# Altium PCB pilar_3.PcbDoc
Units mm, origin at the board's own origin, x right, y up, seen from the top; angles counter-clockwise.
Board outline 30 x 50.01 mm, 2 copper layers (Top Layer, Bottom Layer); 6 components, 4 nets, 16 pads, 2 vias.
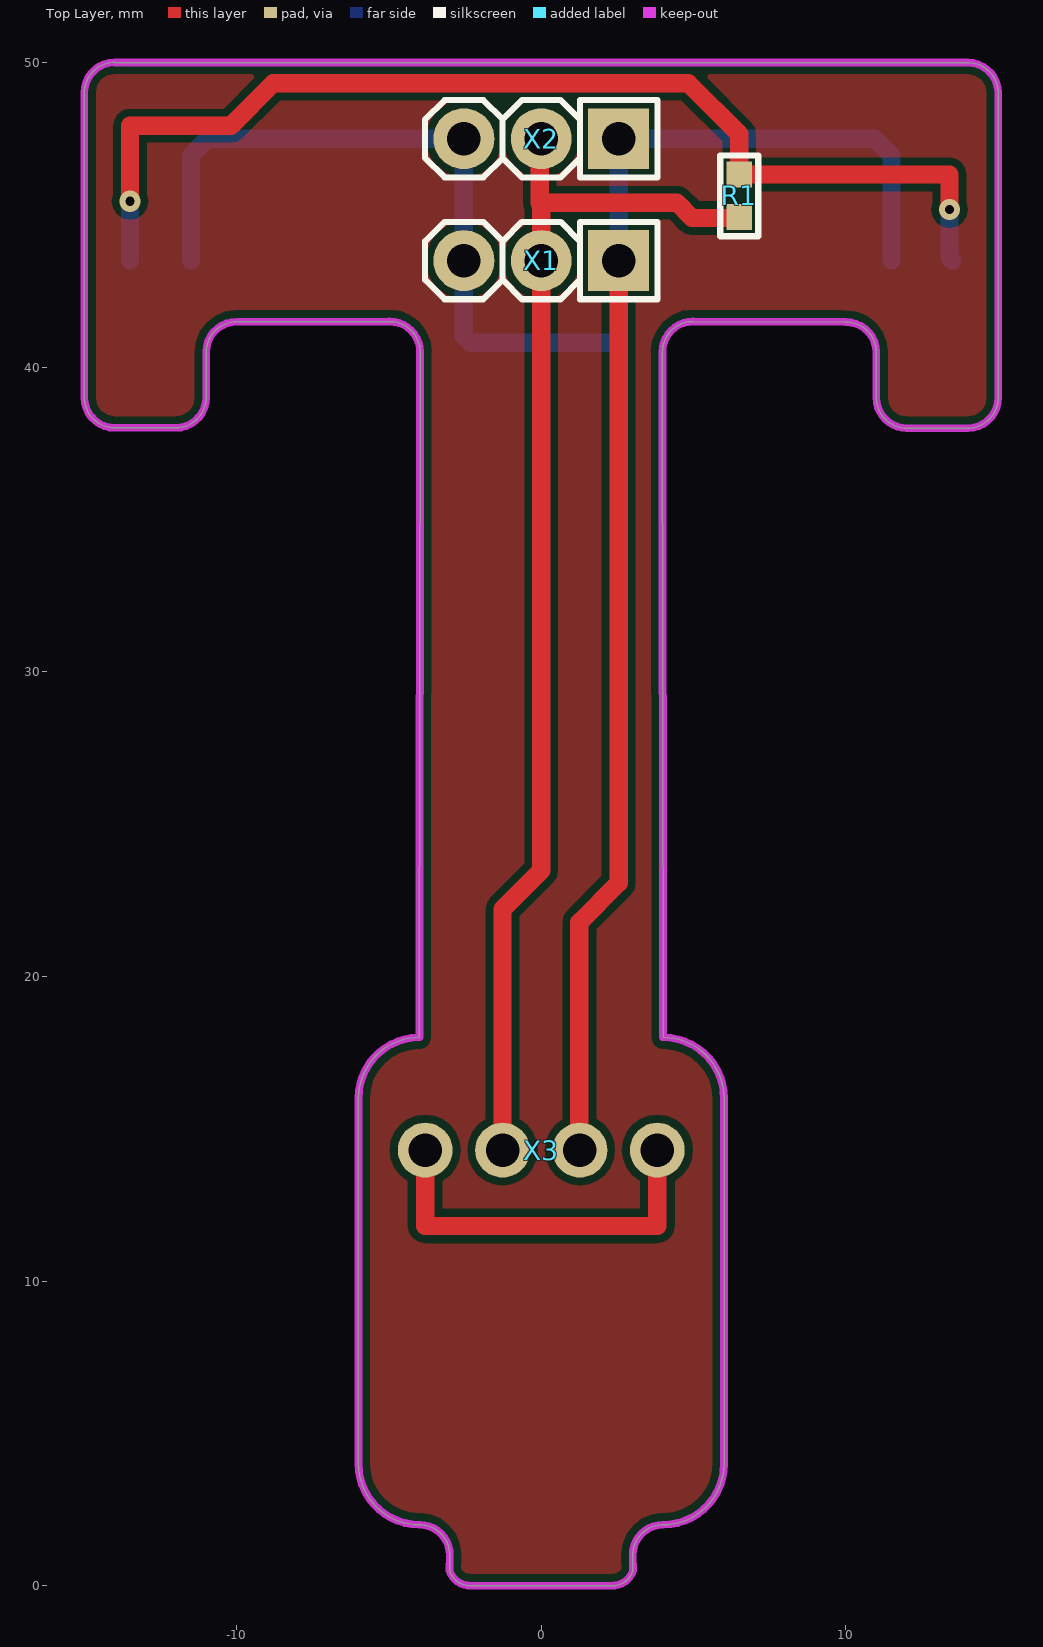
[diagram p0: Top Layer view]
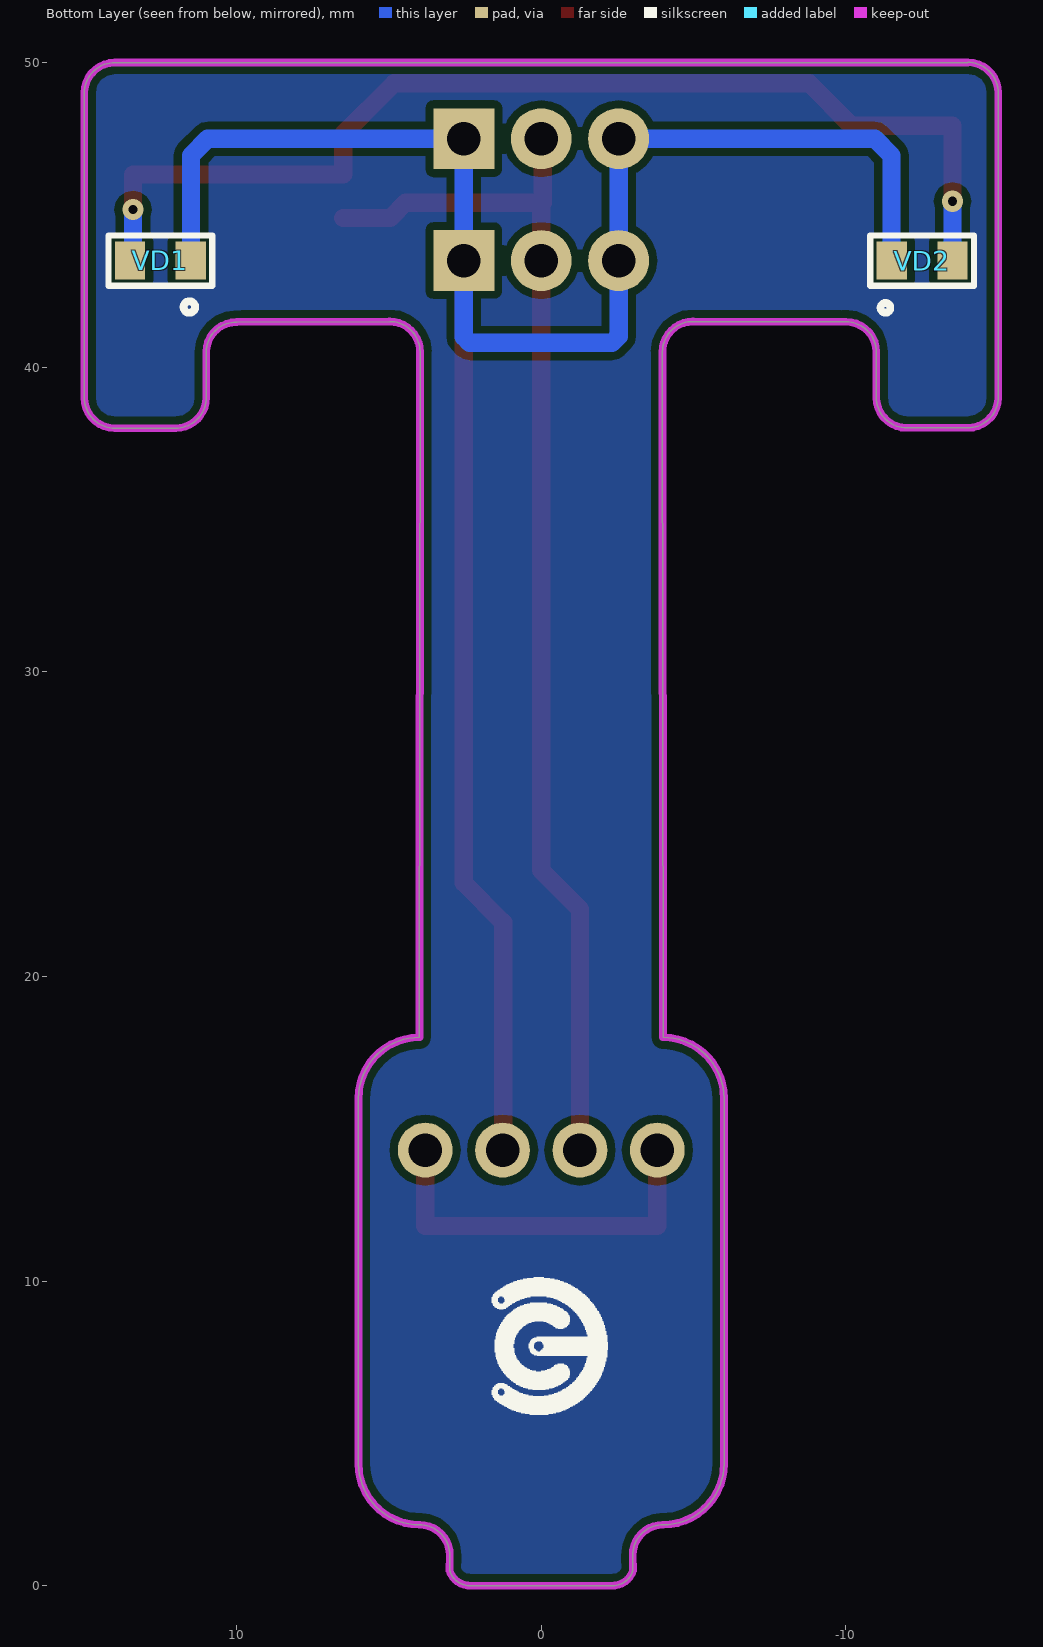
[diagram p1: Bottom Layer view, seen from below]

## Layer stack, top to bottom
Top Solder: solder mask 0.0102, Solder Resist, Dk 3.5
Top Layer: signal copper 0.0356
Dielectric 1: dielectric 0.32, FR-4, Dk 4.8
Bottom Layer: signal copper 0.0356
Bottom Solder: solder mask 0.0102, Solder Resist, Dk 3.5

## Board outline
-6,4 -6,16 cw(c-4,16) -4,18 -3.979,40.5 ccw(c-4.979,40.5) -4.979,41.5 -10,41.489 ccw(c-10.01,40.499) -11,40.509 -11,39.009 cw(c-12,39.009) -12,38.009 -14,38.009 cw(c-14,39.009) -15,39.009 -15,49.009 cw(c-14,49.009) -14,50.009 -14,50 0,50 14,50 cw(c14,49) 15,49 15,39 cw(c14,39) 14,38 12,38 cw(c12,39) 11,39 11,40.5 ccw(c10.01,40.49) 10,41.48 4.978,41.491 4.979,41.5 ccw(c4.979,40.5) 3.979,40.5 4,18 cw(c4,16) 6,16 6,4 cw(c4,4) 4,2 ccw(c4,1) 3,1 3.011,0.5 cw(c2.337,0.703) 2.3,0 -2.3,0 cw(c-2.337,0.703) -3.011,0.5 -3,1 ccw(c-4,1) -4,2 cw(c-4,4)

## Design rules (kind name [scope] priority, off if disabled: settings)
Clearance [All] p1: gap=0.254 ignorepadtopadclearanceinfootprint=FALSE except(0: Arc-Hole Track-Hole SMDPad-Hole THPad-Hole Via-Hole Fill-Hole Poly-Hole Region-Hole Text-Hole)
PolygonConnect [All] p1: connectstyle=Relief reliefconductorwidth=0.254 reliefentries=4 polygonreliefangle="90 Angle" airgapwidth=0.254
RoutingVias [All] p1: holewidth=0.711 width=1.27 viastyle="Through Hole" minholewidth=0.711 minwidth=1.27 maxholewidth=0.711 maxwidth=1.27
SolderMaskExpansion [All] p1: expansion=0.102
Width [All] p1: maxlimit=10 minlimit=0.254 preferedwidth=0.254 minimp=50.000000 maximp=50.000000 favimp=50.000000
30 further rules are at their usual default settings.

## Classes and differential pairs
component class pilar_3: R1 VD1 VD2 X1 X2

## Components (designator, comment, footprint, x,y, rotation, side; value= is the part's Value field where it differs from the comment)
R1 "Resistor film, 100R, ±5%, 0603, 0.1W, -55...+125°C" "RES: 0603" 6.5,45.625 r90 top value=100R
VD1 "LED, *, *, *, -55...+150°C" "LED: 0805R" 12.5,43.5 r180 bottom
VD2 "LED, *, *, *, -55...+150°C" "LED: 0805R" -12.5,43.5 r0 bottom
X1 "Connector, 3pin, 2.54mm, 500VAC, 3A" "CON: PLS-3" 0,43.5 r180 top
X2 "Connector, 3pin, 2.54mm, 500VAC, 3A" "CON: PLS-3" 0,47.5 r180 top
X3 "Connector, 4pin, 2.54mm, 500VAC, 3A" "4PLS RIGHT ANGLE 2" 0,14.3 r180 top

## Footprints (in the part's own frame and the unit in brackets; to place one, negate y for a bottom-side part, rotate by r counter-clockwise, add the part's x,y. Pads: shape width x height; smd on the part's side, far side on the other; paste and mask are expansions set on the pad)
"4PLS RIGHT ANGLE 2" [mm]
  round 1.8 hole 1.1: 1(-3.81,0) 2(-1.27,0) 3(1.27,0) 4(3.81,0)
  body extent -5.04,-0.32 5.14,10.04, height 2.57
"CON: PLS-3" [mm]
  rect 2x2 hole 1.1: 1(-2.54,0)
  round 2 hole 1.1: 2(0,0) 3(2.54,0)
  silkscreen extent -3.81,-1.27 3.81,1.27, body extent -3.81,-1.27 3.81,1.27, height 8.54
"LED: 0805R" [mm]
  rect 1x1.25 smd: 1(-1,0) 2(1,0)
  silkscreen extent -1.7,-0.82 1.7,0.82, body extent -1.05,-0.67 1.05,0.68, height 0.9
"RES: 0603" [mm]
  rect 0.85x0.85 smd: 1(-0.7,0) 2(0.7,0)
  silkscreen extent -1.33,-0.63 1.33,0.63, body extent -0.8,-0.4 0.8,0.4, height 0.44

## Part data
R1: library part Resistor_0603, Manufacturer=Yageo, Package=0603, PartNumber=RC0603JR-07100RL, Power=0.1W, Temperature=-55...+125°C, Tolerance=±5%, TypeResistor="Resistor film", HelpURL=https://www.digikey.com/product-detail/en/yageo/RC0603JR-07100RL/311-100GRCT-ND/729644, ValueManufacturerPartNumber="Resistor film, 100R, ±5%, 0603, 0.1W, -55...+125°C"
VD1 VD2: library part LED_single, Color=GREEN, Temperature=-55...+150°C, TypeDiode=LED, ValueManufacturerPartNumber="LED, *, *, *, -55...+150°C"
X1 X2: library part PLS-3, CurrentMax=3A, Manufacturer=Connfly, VoltageMax=500VAC, CommentText="\"Ðàçúåì\"", HelpURL=https://www.chipdip.ru/product/pls-3, Multichannel=3pin, PartNumber=PLS-3, Pitch=2.54mm, TypeConnector=Connector, ValueManufacturerPartNumber="Connector, 3pin, 2.54mm, 500VAC, 3A"
X3: library part PLS-4, CurrentMax=3A, Manufacturer=Connfly, VoltageMax=500VAC, CommentText="\"Ðàçúåì\"", HelpURL=https://www.chipdip.ru/product/pls-4, Multichannel=4pin, PartNumber=PLS-4, Pitch=2.54mm, TypeConnector=Connector, ValueManufacturerPartNumber="Connector, 4pin, 2.54mm, 500VAC, 3A"

## Via types
v1: diameter 0.7, hole 0.3, Top Layer to Bottom Layer, 2 vias

## Nets (pads, with @x,y where several pads share a name; then routed paths per layer and width w, separated by ;. In a path a pad name is that pad's centre, name@x,y a point inside that pad or via, vN(x,y) a via of type N, cw(c..) or ccw(c..) an arc to the next point about the centre after c; other vN are vias at no path point)
GND: VD1.2 VD2.2 X1.1 X1.3 X2.1 X2.3 X3.2 | length 73.3
  Top Layer w0.6: X3.2 1.25,14.32 1.25,21.775 2.54,23.065 X1.1
  Bottom Layer w0.6: VD2.2 -11.5,46.95 -10.95,47.5 X2.3 X1.3 -2.54,41.015 -2.325,40.8 2.35,40.8 2.54,40.99 X1.1 X2.1 10.95,47.5 11.5,46.95 VD1.2
NetR1_2: R1.2 VD1.1 VD2.1 | length 36.8
  Top Layer w0.6: v1(-13.5,45.45) -13.5,47.925 -10.194,47.925 -8.8,49.319 4.831,49.319 6.5,47.65 R1.2 13.4,46.325 v1(13.4,45.175)
  Bottom Layer w0.6: VD2.1 v1(-13.5,45.45) ; v1(13.4,45.175) 13.4,43.6 VD1.1
NetX3_1: X3.1 X3.4 | length 12.6
  Top Layer w0.6: X3.4 -3.81,11.81 3.81,11.81 X3.1
VCC: R1.1 X1.2 X2.2 X3.3 | length 40.5
  Top Layer w0.6: X3.3 -1.27,22.205 0,23.475 X1.2 0,45.35 -0.05,45.4 ; X2.2 -0.05,47.45 -0.05,45.4 ; R1.1@6.5,44.9 4.95,44.9 4.45,45.4 -0.05,45.4

## Polygon pours and split planes (outlines as drawn)
no net on Top Layer "Top Layer-No Net" (solid, pour order 2): -6,4 -6,16 cw(c-4,16) -4,18 -3.979,40.5 ccw(c-4.979,40.5) -4.979,41.5 -10,41.489 ccw(c-10.01,40.499) -11,40.509 -11,39.009 cw(c-12,39.009) -12,38.009 -14,38.009 cw(c-14,39.009) -15,39.009 -15,49.009 cw(c-14,49.009) -14,50.009 -14,50 0,50 14,50 cw(c14,49) 15,49 15,39 cw(c14,39) 14,38 12,38 cw(c12,39) 11,39 11,40.5 ccw(c10.01,40.49) 10,41.48 4.978,41.491 4.979,41.5 ccw(c4.979,40.5) 3.979,40.5 4,18 cw(c4,16) 6,16 6,4 cw(c4,4) 4,2 ccw(c4,1) 3,1 3.011,0.5 cw(c2.337,0.703) 2.3,0 -2.3,0 cw(c-2.337,0.703) -3.011,0.5 -3,1 ccw(c-4,1) -4,2 cw(c-4,4)
no net on Bottom Layer "Top Layer-No Net1" (solid, pour order 3): -6,4 -6,16 cw(c-4,16) -4,18 -3.979,40.5 ccw(c-4.979,40.5) -4.979,41.5 -10,41.489 ccw(c-10.01,40.499) -11,40.509 -11,39.009 cw(c-12,39.009) -12,38.009 -14,38.009 cw(c-14,39.009) -15,39.009 -15,49.009 cw(c-14,49.009) -14,50.009 -14,50 0,50 14,50 cw(c14,49) 15,49 15,39 cw(c14,39) 14,38 12,38 cw(c12,39) 11,39 11,40.5 ccw(c10.01,40.49) 10,41.48 4.978,41.491 4.979,41.5 ccw(c4.979,40.5) 3.979,40.5 4,18 cw(c4,16) 6,16 6,4 cw(c4,4) 4,2 ccw(c4,1) 3,1 3.011,0.5 cw(c2.337,0.703) 2.3,0 -2.3,0 cw(c-2.337,0.703) -3.011,0.5 -3,1 ccw(c-4,1) -4,2 cw(c-4,4)

## Keep-outs
Keep-Out Layer:
  lines w0.254: -14,50 0,50 14,50 cw(c14,49) 15,49 15,39 cw(c14,39) 14,38 12,38 cw(c12,39) 11,39 11,40.5 ccw(c10.01,40.49) 10,41.48 4.978,41.491 ; -14,50.009 ccw(c-14,49.009) -15,49.009 -15,39.009 ccw(c-14,39.009) -14,38.009 -12,38.009 ccw(c-12,39.009) -11,39.009 -11,40.509 cw(c-10.01,40.499) -10,41.489 -4.979,41.5 cw(c-4.979,40.5) -3.979,40.5 -4,18 ccw(c-4,16) -6,16 -6,4 ccw(c-4,4) -4,2 cw(c-4,1) -3,1 -3.011,0.5 ccw(c-2.337,0.703) -2.3,0 2.3,0 ccw(c2.337,0.703) 3.011,0.5 3,1 cw(c4,1) 4,2 ccw(c4,4) 6,4 6,16 ccw(c4,16) 4,18 3.979,40.5 cw(c4.979,40.5) 4.979,41.5

## Silkscreen, mask and mechanical layers (free items; w line width, h text height)
Bottom Overlay:
  drawing of 378 lines, arcs and shapes, not listed